# Altium PCB EboxPCBv2.PcbDoc
Units mm, origin at the board's own origin, x right, y up, seen from the top; angles counter-clockwise.
Board outline 163.32 x 100 mm, 2 copper layers (Top Layer, Bottom Layer); 62 components, 31 nets, 113 pads, 0 vias.
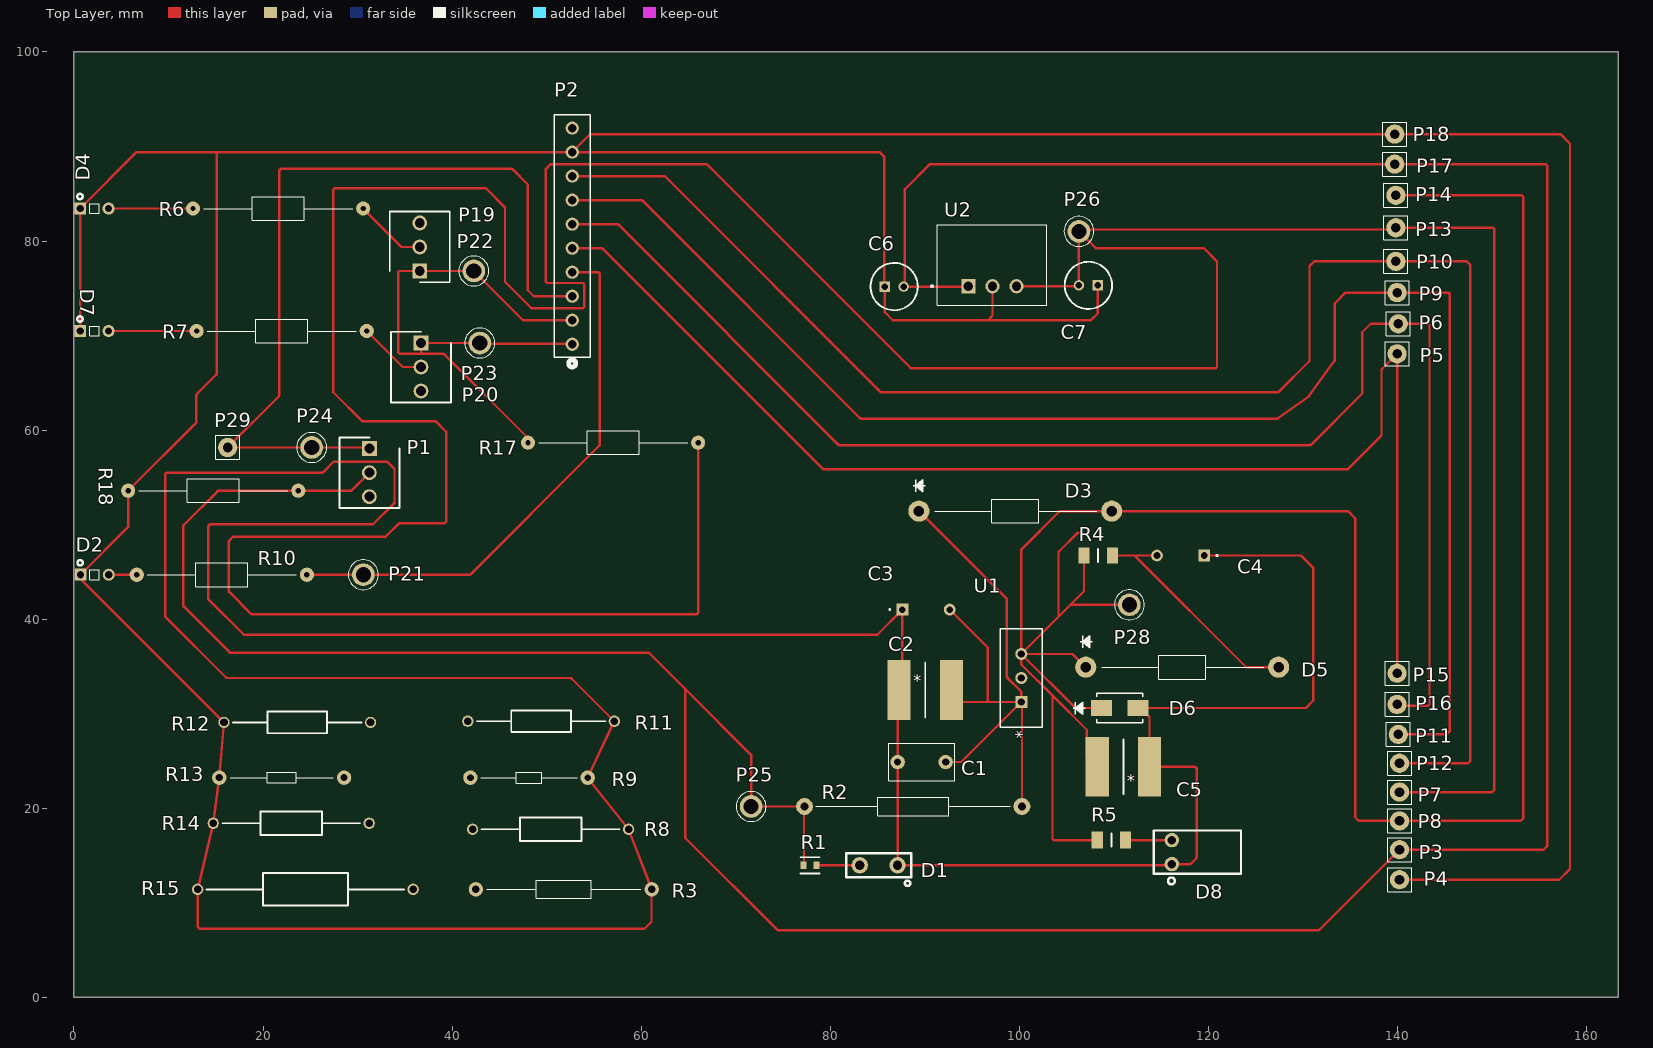
[diagram p0: Top Layer view]
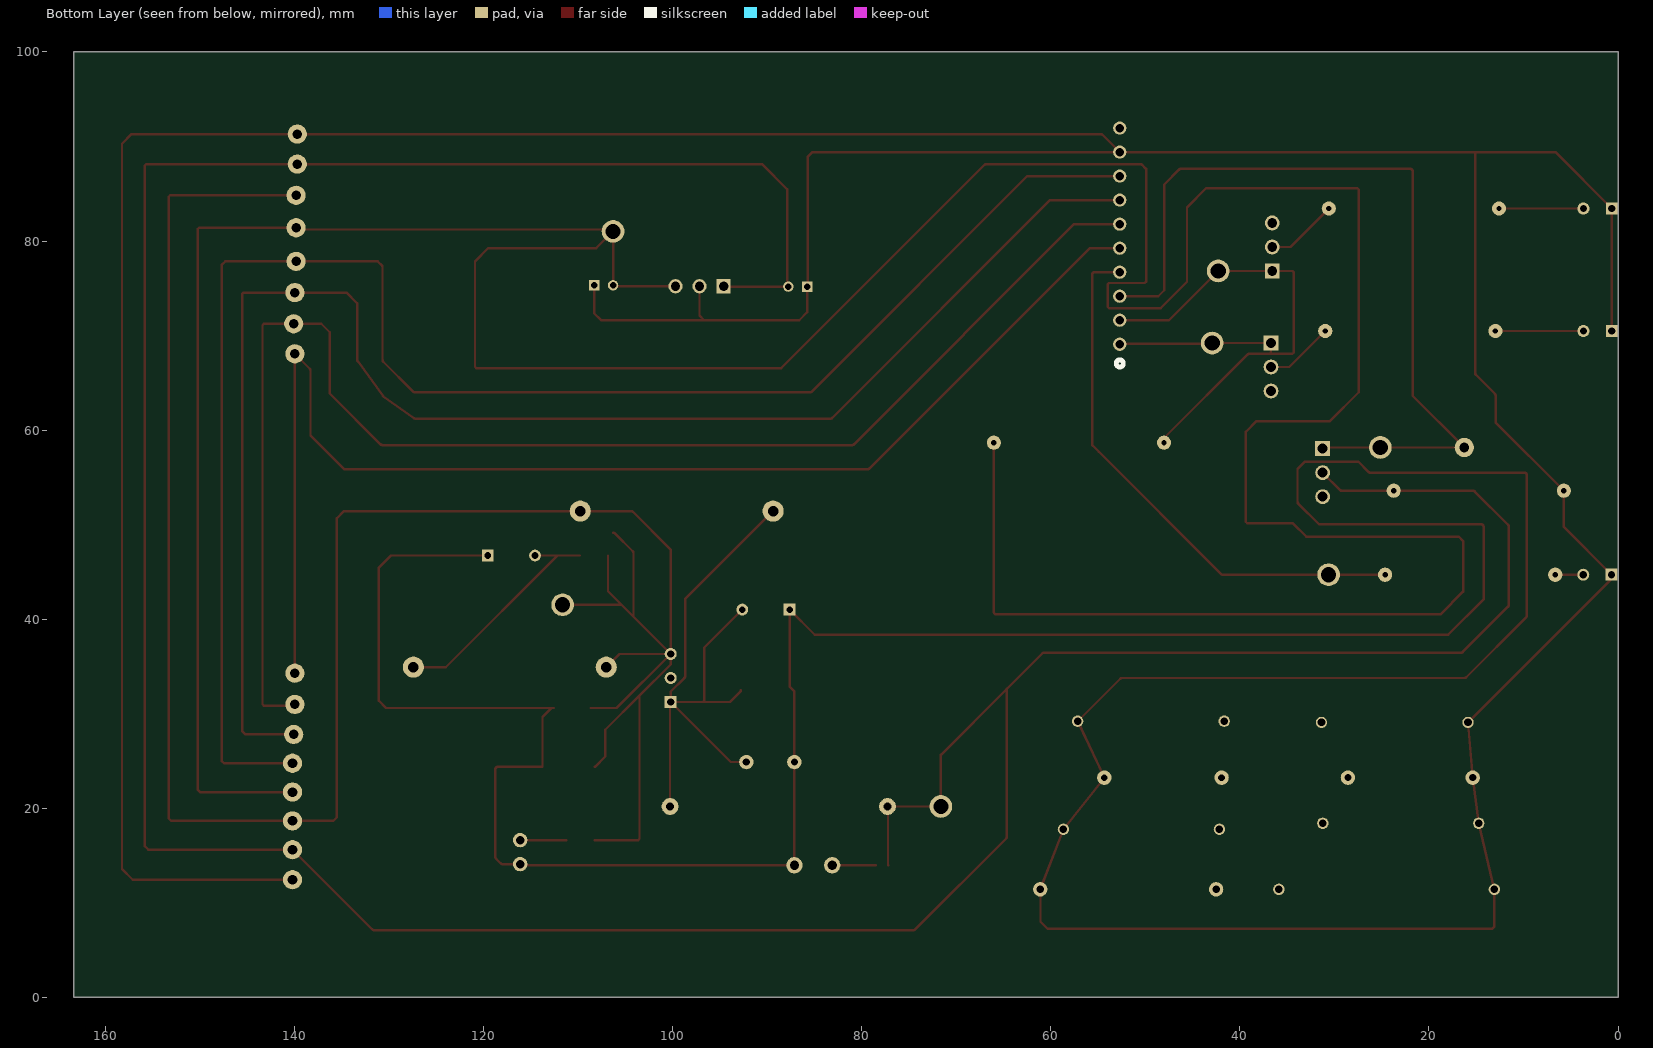
[diagram p1: Bottom Layer view, seen from below]

## Layer stack, top to bottom
Top Solder: solder mask 0.0102, Solder Resist, Dk 3.5
Top Layer: signal copper 0.0356
Dielectric 1: dielectric 0.32, FR-4, Dk 4.8
Bottom Layer: signal copper 0.0356
Bottom Solder: solder mask 0.0102, Solder Resist, Dk 3.5

## Board outline
0,0 163.322,0 163.322,100 0,100

## Design rules (kind name [scope] priority, off if disabled: settings)
Clearance [All] p1: gap=0.254 ignorepadtopadclearanceinfootprint=FALSE except(0: Arc-Hole Track-Hole SMDPad-Hole THPad-Hole Via-Hole Fill-Hole Poly-Hole Region-Hole Text-Hole)
PolygonConnect [All] p1: connectstyle=Relief reliefconductorwidth=0.254 reliefentries=4 polygonreliefangle="90 Angle" airgapwidth=0.254
RoutingVias [All] p1: holewidth=0.711 width=1.27 viastyle="Through Hole" minholewidth=0.711 minwidth=1.27 maxholewidth=0.711 maxwidth=1.27
SolderMaskExpansion [All] p1: expansion=0.102 istentingtop=FALSE
Width [All] p1: maxlimit=0.254 minlimit=0.254 preferedwidth=0.254
30 further rules are at their usual default settings.

## Classes and differential pairs
component class EBoxschematic: P2

## Components (designator, comment, footprint, x,y, rotation, side; value= is the part's Value field where it differs from the comment)
C1 "0.1u" 0.1uF 89.662,24.892 r0 top
C2 "10u" "100uF Tantalum" 90.043,32.512 r0 top
C3 "1u" 1uF 87.63,41.021 r0 top
C4 "Capacitor" 1uF 119.554,46.736 r180 top
C5 "100u" "100uF Tantalum" 110.998,24.384 r180 top
C6 "10u" 10uF 85.757,75.184 r0 top
C7 "10u" 10uF 108.299,75.311 r180 top
D1 "LED" "LED 12V Thru Hole" 85.122,13.97 r180 top
D2 "LED" "LED 5V Arduino Thru Hole" 2.176,44.704 r0 top
D3 "Diode" "Protective Diode" 99.568,51.435 r0 top
D4 "LED" "LED 5V Arduino Thru Hole" 2.159,83.439 r0 top
D5 "Diode" "Protective Diode" 117.221,34.925 r0 top
D6 "Diode" "Schottky Diode" 110.617,30.607 r0 top
D7 "LED" "LED 5V Arduino Thru Hole" 2.159,70.485 r0 top
D8 "LED" "LED 5V Thru Hole" 120.523,15.367 r180 top
P1 "Switch" "3x1 KK Molex" 31.242,58.039 r270 top
P2 "1x10 female header" "1x10 header pin" 52.705,69.088 r90 top
P3 "28V" Via 140.208,15.621 r0 top
P4 "GND" Via 140.208,12.446 r0 top
P5 "SIG4" Via 139.954,68.072 r0 top
P6 "SIG3" Via 140.081,71.247 r0 top
P7 "5V" Via 140.208,21.717 r0 top
P8 "10V" Via 140.208,18.669 r0 top
P9 "SIG2" Via 139.954,74.549 r0 top
P10 "SIG1" Via 139.827,77.851 r0 top
P11 "SIG2" Via 140.081,27.813 r0 top
P12 "SIG1" Via 140.208,24.765 r0 top
P13 "5V" Via 139.827,81.407 r0 top
P14 "10V" Via 139.827,84.836 r0 top
P15 "SIG4" Via 139.954,34.29 r0 top
P16 "SIG3" Via 139.954,30.988 r0 top
P17 "28V" Via 139.7,88.138 r0 top
P18 "GND" Via 139.7,91.313 r0 top
P19 "Button" "3x1 KK Molex" 36.576,76.835 r90 top
P20 "Button" "3x1 KK Molex" 36.703,69.215 r270 top
P21 "Test Point" "Test Point" 30.607,44.704 r90 top
P22 "Test Point" "Test Point" 42.291,76.835 r270 top
P23 "Test Point" "Test Point" 42.926,69.215 r270 top
P24 "Test Point" "Test Point" 25.146,58.166 r0 top
P25 "Test Point" "Test Point" 71.628,20.193 r0 top
P26 "Test Point" "Test Point" 106.299,81.026 r0 top
P28 "Test Point" "Test Point" 111.633,41.529 r180 top
P29 "Comment" Via 16.256,58.166 r0 top
R1 "1.5k" "LV Resistor" 77.851,13.97 r0 top
R2 "1.5" "1.5 Ohm" 88.773,20.193 r180 top
R3 "2.87k" "2.87k Ohm" 51.816,11.43 r0 top
R4 "249" "249 Ohm" 108.331,46.736 r0 top
R5 "340" "340 Ohm" 109.728,16.637 r0 top
R6 "220" "Arduino Resistors" 21.59,83.439 r180 top
R7 "220" "Arduino Resistors" 21.971,70.485 r180 top
R8 "2.67k" "2.67k Ohm" 42.164,17.78 r0 top
R9 "2.49k" "2.49k Ohm" 48.133,23.241 r0 top
R10 "220" "Arduino Resistors" 15.638,44.704 r0 top
R11 "2.32k" "2.32k Ohm" 41.656,29.21 r0 top
R12 "2.1k" "2.1k Ohm" 31.369,29.083 r180 top
R13 "1.91k" "1.91k Ohm" 21.971,23.241 r180 top
R14 "1.69k" "1.69k Ohm" 31.232,18.415 r180 top
R15 "1.5k" "1.5k Ohm" 35.881,11.43 r180 top
R17 "1M" "Arduino Resistors" 57.023,58.674 r180 top
R18 "1M" "Arduino Resistors" 14.732,53.594 r180 top (schematic designator R17)
U1 "Linear Regulator" "Linear Regulator" 100.203,31.242 r90 top
U2 "Step Down Converter" "Step Down Converter" 97.155,77.47 r0 top

## Footprints (in the part's own frame and the unit in brackets; to place one, negate y for a bottom-side part, rotate by r counter-clockwise, add the part's x,y. Pads: shape width x height; smd on the part's side, far side on the other; paste and mask are expansions set on the pad)
0.1uF [mil] "C322C104K5R5TA7305"
  round 60 hole 30: 1(-100,0) 2(100,0)
  silkscreen extent -138,-79 138,79
"1.5 Ohm" [mil] "PR01000101508JR500"
  round 70 hole 35: 1(-452.76,0) 2(452.76,0)
  silkscreen extent -405,-39 405,39
"1.5k Ohm" [mm] "RESAD2280W60L900D345"
  round 1.2 hole 0.8: 1(0,0) 2(22.8,0)
  silkscreen extent 0.95,-1.73 21.85,1.73, body extent -0.3,-1.95 23.1,1.95, height 3.9
"1.69k Ohm" [mm] "RESAD1650W60L650D250"
  round 1.2 hole 0.8: 1(0,0) 2(16.5,0)
  silkscreen extent 0.95,-1.25 15.55,1.25, body extent -0.3,-1.25 16.8,1.25, height 2.49
"1.91k Ohm" [mil] "MBA02040C1911FRP00"
  round 60 hole 29.68: 1(-259.84,0) 2(259.84,0)
  silkscreen extent -215,-21 215,21
1uF [mm] "FG28"
  rect 1.25x1.25 hole 0.7: 1(0,0)
  round 1.25 hole 0.7: 2(5,0)
  silkscreen extent -1.4,-0.05 -1.3,0.05, body extent -0.25,-1.25 5.25,1.25, height 5.6
"1x10 header pin" [mil] "5-535541-8_TYC"
  round 55 hole 35 mask+0: A1(0,0) A2(100,0) A3(200,0) A4(300,0) A5(400,0) A6(500,0) A7(600,0) A8(700,0) A9(800,0) A10(900,0)
  silkscreen extent -95,-75 955,75, body extent 0,0 10,10, height 10
"2.1k Ohm" [mm] "RESAD1550W60L630D230"
  round 1.2 hole 0.8: 1(0,0) 2(15.5,0)
  silkscreen extent 0.95,-1.15 14.55,1.15, body extent -0.3,-1.25 15.8,1.25, height 2.49
"2.32k Ohm" [mm] "RESAD1550W60L630D230"
  round 1.2 hole 0.8: 1(0,0) 2(15.5,0)
  silkscreen extent 0.95,-1.15 14.55,1.15, body extent -0.3,-1.25 15.8,1.25, height 2.49
"2.49k Ohm" [mil] "MFS1/4DCT52R2491F"
  round 60 hole 28: 1(-244.09,0) 2(244.09,0)
  silkscreen extent -200,-23 200,23
"2.67k Ohm" [mm] "RESAD1650W60L650D250"
  round 1.2 hole 0.8: 1(0,0) 2(16.5,0)
  silkscreen extent 0.95,-1.25 15.55,1.25, body extent -0.3,-1.25 16.8,1.25, height 2.49
"2.87k Ohm" [mil] "MFR-25FBF52-2K87"
  round 60 hole 31.65: 1(-366.14,0) 2(366.14,0)
  silkscreen extent -320,-37 320,37
"3x1 KK Molex" [mm] "22112032 - HDRV3W87P0X254_1X3_747X635X1105P"
  rect 1.575x1.575 hole 1.05: 1(0,0)
  round 1.575 hole 1.05: 2(2.54,0) 3(5.08,0)
  silkscreen extent -1.19,-3.18 6.27,3.18, body extent -1.19,-3.24 6.27,3.11, height 10.65
10uF [mm] "CAPPRD200W52D500H1250"
  rect 1.1x1.1 hole 0.7: 1(0,0)
  round 1.1 hole 0.7: 2(2,0)
  silkscreen extent -1.5,-2.5 3.5,2.5, body extent -1.75,-2.75 3.75,2.75, height 12.5
"100uF Tantalum" [mm] "CAPC7360X200N"
  rect 2.47x6.32 smd: 1(-2.77,0) 2(2.77,0)
  silkscreen extent 0,-2.9 0,2.9, body extent -3.65,-3 3.65,3, height 2
"249 Ohm" [mm] "RESC3216X70N"
  rect 1.15x1.7 smd: 1(-1.5,0) 2(1.5,0)
  silkscreen extent 0,-0.67 0,0.67, body extent -1.6,-0.77 1.6,0.77, height 0.7
"340 Ohm" [mm] "RESC3216X75N"
  rect 1.2x1.8 smd: 1(-1.5,0) 2(1.5,0)
  silkscreen extent 0,-0.7 0,0.7, body extent -1.6,-0.8 1.6,0.8, height 0.75
"Arduino Resistors" [mm] "Through-hole"
  round 1.5 hole 0.564: 1(-9,0) 2(9,0)
  silkscreen extent -7.87,-1.25 7.87,1.25
"LED 5V Arduino Thru Hole" [mm]
  rect 1.27x1.27 hole 0.754: 1(-1.5,0)
  round 1.27 hole 0.754: 2(1.5,0)
  silkscreen extent -1.81,-0.51 0.51,1.55
"LED 5V Thru Hole" [mil] "WP934EW/GD5V"
  round 60 hole 35.43: 1(173,50) 2(173,-50)
  silkscreen extent -115,-90 249,134
"LED 12V Thru Hole" [mm] "609-1112-130F"
  round 1.727 hole 0.965: 1(-2,0) 2(2,0)
  silkscreen extent -3.43,-1.27 3.43,2.19
"Linear Regulator" [mil] "TO220-3_ONS"
  rect 50x50 hole 30 mask+0: 1(0,0)
  round 50 hole 30 mask+0: 2(100,0) 3(200,0)
  silkscreen extent -105,-88 305,88, body extent 0,0 10,10, height 10
"LV Resistor" [mm] "Yageo_AC0603_IPC_C"
  rect 0.659x0.812 smd paste+0 mask+0: 1(-0.677,0) 2(0.677,0)
  silkscreen extent -1.01,-0.85 1.01,0.85, body extent -1.11,-0.55 1.11,0.55, height 0.25
"Protective Diode" [mm] "1N4002-E3/54"
  round 2.228 hole 1.114: 1(-10.2,0) 2(10.2,0)
  silkscreen extent -10.79,-1.25 8.64,3.3
"Schottky Diode" [mil] "SMA_STM"
  rect 87x67 smd paste+0 mask+0: 1(-76,0) 2(76,0)
  silkscreen extent -194,-62 96,62, body extent 0,0 10,10, height 10
"Step Down Converter" [mm] "CONV_R-78E5.0-1.0"
  rect 1.508x1.508 hole 1: 1(-2.54,-2.25)
  round 1.508 hole 1: 2(0,-2.25) 3(2.54,-2.25)
  silkscreen extent -6.5,-4.25 5.75,4.25
"Test Point" [mm] "TESTPOINT_5013"
  round 2.4 hole 1.6: 1(0,0)
  silkscreen extent -1.58,-1.59 1.58,1.59
Via [mil]
  round 80 hole 40: VIA(0,0)
  silkscreen extent -50,-50 50,50

## Part data
C1 C3 C6 C7: library part Capacitor
C2 C5: library part "Tantalum Capacitor"
P1 P19 P20: library part "KK 254 1x3 male header", "22112032"
P2: "5-535541-8"
P3 P4 P5 P6 P7 P8 P9 P10 P11 P12 P13 P14 P15 P16 P17 P18: library part "Output Point"
R1 R2 R3 R4 R5 R6 R7 R8 R9 R10 R11 R12 R13 R14 R15 R17 R18: library part Resistor
U1: "511-LM317BT"
U2: "R-78E5.0-1.0"

## Nets (pads, with @x,y where several pads share a name; then routed paths per layer and width w, separated by ;. In a path a pad name is that pad's centre, name@x,y a point inside that pad or via, vN(x,y) a via of type N, cw(c..) or ccw(c..) an arc to the next point about the centre after c; other vN are vias at no path point)
5V: C7.2 P7.VIA P13.VIA P26.1 R17.1 U2.3 | length 430.7
  Top Layer w0.254: R17.1 66.023,40.767 cw(c65.769,40.767) 65.769,40.513 18.796,40.513 16.383,42.926 16.383,48.26 16.838,48.715 32.967,48.715 34.417,50.165 39.221,50.165 39.37,50.314 39.37,59.817 38.227,60.96 30.48,60.96 27.432,64.008 27.432,85.449 27.581,85.598 43.561,85.598 45.593,83.566 45.593,75.692 48.387,72.898 53.826,72.898 53.975,73.047 53.975,75.416 53.826,75.565 50.06,75.565 49.911,75.714 49.911,87.63 50.345,88.064 cw(c50.524,87.884) 50.524,88.138 66.824,88.138 cw(c66.824,87.884) 67.003,88.064 88.519,66.548 120.755,66.548 120.904,66.697 120.904,77.851 119.507,79.248 108.077,79.248 P26.1 ; U2.3 106.079,75.22 ccw(c106.079,75.531) C7.2 P26.1 ; P7.VIA 149.987,21.717 150.241,21.971 150.241,81.258 150.092,81.407 P13.VIA 139.636,81.216 106.489,81.216 P26.1
10V: C5.2 D3.2 D5.1 D6.1 P8.VIA P14.VIA P28.1 R4.1 R5.1 U1.3 | length 259.9
  Top Layer w0.254: 104.371,51.435 ccw(c104.372,51.181) 104.193,51.361 100.276,47.444 ccw(c100.457,47.266) 100.203,47.267 U1.3 ; 104.372,51.435 D3.2 134.747,51.435 135.509,50.673 135.509,19.05 135.89,18.669 P8.VIA 153.035,18.669 153.289,18.923 153.289,84.687 153.14,84.836 P14.VIA ; 106.277,49.149 ccw(c106.277,48.895) 106.098,49.075 104.213,47.19 ccw(c104.394,47.012) 104.14,47.013 104.14,40.259 ; R4.1 106.831,42.95 105.41,41.529 ; D5.1 105.624,36.322 U1.3 ; R5.1 103.654,16.637 103.505,16.786 103.505,31.917 ; C5.2 107.12,25.492 107.12,28.302 103.505,31.917 ; D6.1 105.918,30.607 U1.3 ; P28.1 105.41,41.529 ; U1.3 104.14,40.259 ; U1.3 100.203,35.219 103.505,31.917 ; 104.14,40.259 105.41,41.529
28V: P1.1 P2.A3 P24.1 P29.VIA | length 89.8
  Top Layer w0.254: P1.1 31.115,58.166 P24.1 P29.VIA 21.717,63.627 21.717,87.377 cw(c21.971,87.376) 21.97,87.63 46.25,87.63 cw(c46.25,87.376) 46.429,87.556 48.006,85.979 48.006,74.803 48.641,74.168 P2.A3
28VEdited: 
GND: C1.1 C2.1 C3.1 C4.1 C5.1 C6.1 C7.1 D1.1 D2.1 D4.1 D6.2 D7.1 D8.1 P2.A9 P4.VIA P18.VIA R3.2 R8.2 R9.2 R11.2 R12.2 R13.2 R14.2 R15.2 R18.2 U2.2 | length 841.3
  Top Layer w0.254: D7.1 D4.1 6.628,89.408 15.113,89.408 ; U2.2 97.155,72.136 96.647,71.628 ; C7.1 108.299,72.358 107.643,71.702 cw(c107.464,71.882) 107.464,71.628 96.647,71.628 ; D6.2 D6.2@112.801,30.607 ; C4.1 129.794,46.736 131.064,45.466 131.064,31.369 130.302,30.607 D6.2@112.801,30.607 ; P4.VIA 157.099,12.446 158.242,13.589 158.242,90.297 157.226,91.313 P18.VIA 136.884,91.313 54.715,91.313 ccw(c54.715,91.059) 54.536,91.239 P2.A9 ; 15.113,89.408 15.113,66.042 cw(c14.859,66.042) 15.04,65.864 13.027,63.851 ccw(c13.208,63.673) 12.954,63.674 12.954,60.816 R18.2 5.732,49.76 D2.1 0.676,44.38 ccw(c0.93,44.381) 0.749,44.203 R12.2 R13.2 R14.2 R15.2 13.081,7.493 13.335,7.239 60.325,7.239 61.087,8.001 61.087,11.401 R3.2 R8.2 R9.2 R11.2 52.658,33.708 ccw(c52.479,33.528) 52.479,33.782 16.233,33.782 cw(c16.234,34.036) 16.056,33.855 9.725,40.186 cw(c9.906,40.364) 9.652,40.363 9.652,55.245 cw(c9.906,55.245) 9.906,55.499 26.2,55.499 ccw(c26.2,55.753) 26.38,55.573 27.474,56.668 33.121,56.668 33.909,55.88 33.909,52.429 cw(c33.655,52.429) 33.836,52.251 31.623,50.038 14.478,50.038 ccw(c14.478,49.784) 14.224,49.784 14.224,42.1 17.97,38.354 84.963,38.354 C3.1 87.63,32.869 C2.1 87.122,32.361 D1.1 115.897,13.97 ccw(c115.897,14.224) 116.076,14.044 D8.1 118.005,14.097 ccw(c118.005,14.351) 118.184,14.171 118.671,14.658 ccw(c118.491,14.837) 118.745,14.837 118.745,24.131 ccw(c118.491,24.13) 118.491,24.384 C5.1 113.768,29.64 D6.2@112.801,30.607 ; 15.113,89.408 P2.A9 ; P2.A9 85.217,89.408 85.725,88.9 85.725,75.216 C6.1 85.757,72.485 86.614,71.628 96.647,71.628
LED: P2.A4 P21.1 R10.2 | length 57.7
  Top Layer w0.254: R10.2 P21.1 41.805,44.704 ccw(c41.805,44.958) 41.984,44.778 54.916,57.71 55.553,58.347 ccw(c55.372,58.525) 55.626,58.525 55.626,76.455 ccw(c55.372,76.454) 55.372,76.708 P2.A4
NetC1_2: C1.2 C2.2 C3.2 D3.1 R2.1 U1.1 | length 65.9
  Top Layer w0.254: D3.1 89.426,51.377 98.679,42.124 98.679,33.974 ccw(c98.933,33.974) 98.753,33.795 100.203,32.345 U1.1 ; C1.2 93.853,24.892 U1.1 ; C3.2 96.647,37.004 96.647,31.391 96.796,31.242 ; C2.2 92.813,32.35 93.921,31.242 96.796,31.242 ; R2.1 100.273,31.172 U1.1 ; 96.796,31.242 U1.1
NetC2_2: C4.2 D5.2 R4.2 | length 24.8
  Top Layer w0.254: R4.2 112.193,46.736 ; C4.2 112.193,46.736 ; D5.2 124.004,34.925 112.193,46.736
NetC3_3: C6.2 P1.2 P3.VIA P17.VIA P25.1 R1.1 R2.2 R18.1 U2.1 | length 387.3
  Top Layer w0.254: 15.344,53.594 ccw(c15.345,53.34) 15.166,53.52 11.631,49.985 ccw(c11.811,49.806) 11.557,49.806 11.557,41.507 ccw(c11.811,41.507) 11.631,41.328 16.436,36.523 ccw(c16.615,36.703) 16.615,36.449 60.728,36.449 cw(c60.728,36.195) 60.907,36.375 64.643,32.639 ; 15.345,53.594 R18.1 29.232,53.594 ccw(c29.232,53.848) 29.411,53.668 P1.2 ; R1.1 77.224,14.019 77.224,20.144 R2.2 P25.1 71.628,25.654 64.643,32.639 ; U2.1 cw(c94.528,75.307) 94.528,75.184 C6.2 87.884,75.311 87.884,85.471 90.551,88.138 P17.VIA 155.68,88.138 155.829,87.989 155.829,16.002 155.448,15.621 P3.VIA 131.773,7.186 cw(c131.594,7.366) 131.594,7.112 74.526,7.112 cw(c74.527,7.366) 74.349,7.185 64.716,16.818 cw(c64.897,16.996) 64.643,16.995 64.643,32.639
NetD1_2: D1.2 R1.2 | length 4.6
  Top Layer w0.254: R1.2 D1.2
NetD2_2: D2.2 R10.1 | length 3
  Top Layer w0.254: D2.2 R10.1
NetD4_2: D4.2 R6.2 | length 8.9
  Top Layer w0.254: D4.2 R6.2 R6.2@12.582,83.447
NetD7_2: D7.2 R7.2 | length 9.3
  Top Layer w0.254: D7.2 R7.2 R7.2@12.963,70.477
NetD8_2: D8.2 R5.2 | length 4.9
  Top Layer w0.254: R5.2 D8.2
NetP19_2: P19.2 R6.1 | length 7.7
  Top Layer w0.254: R6.1 34.654,79.375 P19.2
NetP20_2: P20.2 R7.1 | length 7.3
  Top Layer w0.254: R7.1 34.781,66.675 P20.2
NetR3_1: R3.1
NetR8_1: R8.1
NetR9_1: R9.1
NetR11_1: R11.1
NetR12_1: R12.1
NetR13_1: R13.1
NetR14_1: R14.1
NetR15_1: R15.1
NetR16_A: U1.2
ONOFF: P2.A1 P2.A2 P19.1 P20.1 P22.1 P23.1 R17.2 | length 64.4
  Top Layer w0.254: R17.2 48.023,59.06 ccw(c47.769,59.06) 47.948,59.24 39.189,67.999 ccw(c39.011,67.818) 39.011,68.072 36.957,68.072 ; P2.A1 52.642,69.151 42.989,69.151 P23.1 P20.1 36.703,68.326 ccw(c36.957,68.326) 36.957,68.072 ; P2.A2 47.498,71.628 P22.1 P19.1 34.439,76.835 34.29,76.686 34.29,68.221 34.439,68.072 36.957,68.072
PWR: 
SIG1: P2.A8 P10.VIA P12.VIA | length 176.2
  Top Layer w0.254: P2.A8 62.484,86.868 85.27,64.082 ccw(c85.449,64.262) 85.449,64.008 127.276,64.008 ccw(c127.276,64.262) 127.455,64.082 130.609,67.236 ccw(c130.429,67.415) 130.683,67.415 130.683,77.238 cw(c130.937,77.238) 130.757,77.417 131.191,77.851 P10.VIA 147.32,77.851 147.701,77.47 147.701,25.019 147.447,24.765 P12.VIA
SIG2: P2.A7 P9.VIA P11.VIA | length 163.5
  Top Layer w0.254: P2.A7 60.071,84.328 83.111,61.288 ccw(c83.29,61.468) 83.29,61.214 127.215,61.214 ccw(c127.215,61.468) 127.362,61.261 130.601,63.574 ccw(c130.453,63.78) 130.658,63.631 133.301,67.266 ccw(c133.096,67.415) 133.35,67.415 133.35,73.406 134.493,74.549 P9.VIA 145.393,74.549 145.542,74.4 145.542,28.194 145.161,27.813 P11.VIA
SIG3: P2.A6 P6.VIA P16.VIA | length 153.1
  Top Layer w0.254: P2.A6 57.531,81.788 80.825,58.494 ccw(c81.004,58.674) 81.004,58.42 130.705,58.42 ccw(c130.705,58.674) 130.884,58.494 136.271,63.881 136.271,70.358 137.16,71.247 P6.VIA 143.234,71.247 143.383,71.098 143.383,31.01 143.234,30.861 140.081,30.861 P16.VIA
SIG4: P2.A5 P5.VIA P15.VIA | length 139.8
  Top Layer w0.254: P2.A5 55.775,79.248 cw(c55.775,78.994) 55.955,79.173 79.174,55.954 ccw(c79.353,56.134) 79.353,55.88 133.477,55.88 134.747,55.88 138.303,59.436 138.303,66.316 cw(c138.557,66.316) 138.377,66.495 P5.VIA P15.VIA
pads on no net: P1.3 P2.A10 P19.3 P20.3

## Text inside footprints (layer, text, board x,y; h text height)
C2: Top Overlay "*" at 88.773,32.893 h1.27
C5: Top Overlay "*" at 112.268,24.003 h1.27 r180
U1: Top Overlay "*" at 100.838,27.368 h1.27 r90; Mechanical 13 "*" at 100.838,28.639 h1.27 r90